# Altium PCB MotorController3.PcbDoc
Units mil, origin at the board's own origin, x right, y up, seen from the top; angles counter-clockwise.
Board outline 4000 x 3000 mil, 2 copper layers (Top Layer, Bottom Layer); 37 components, 31 nets, 115 pads, 10 vias.
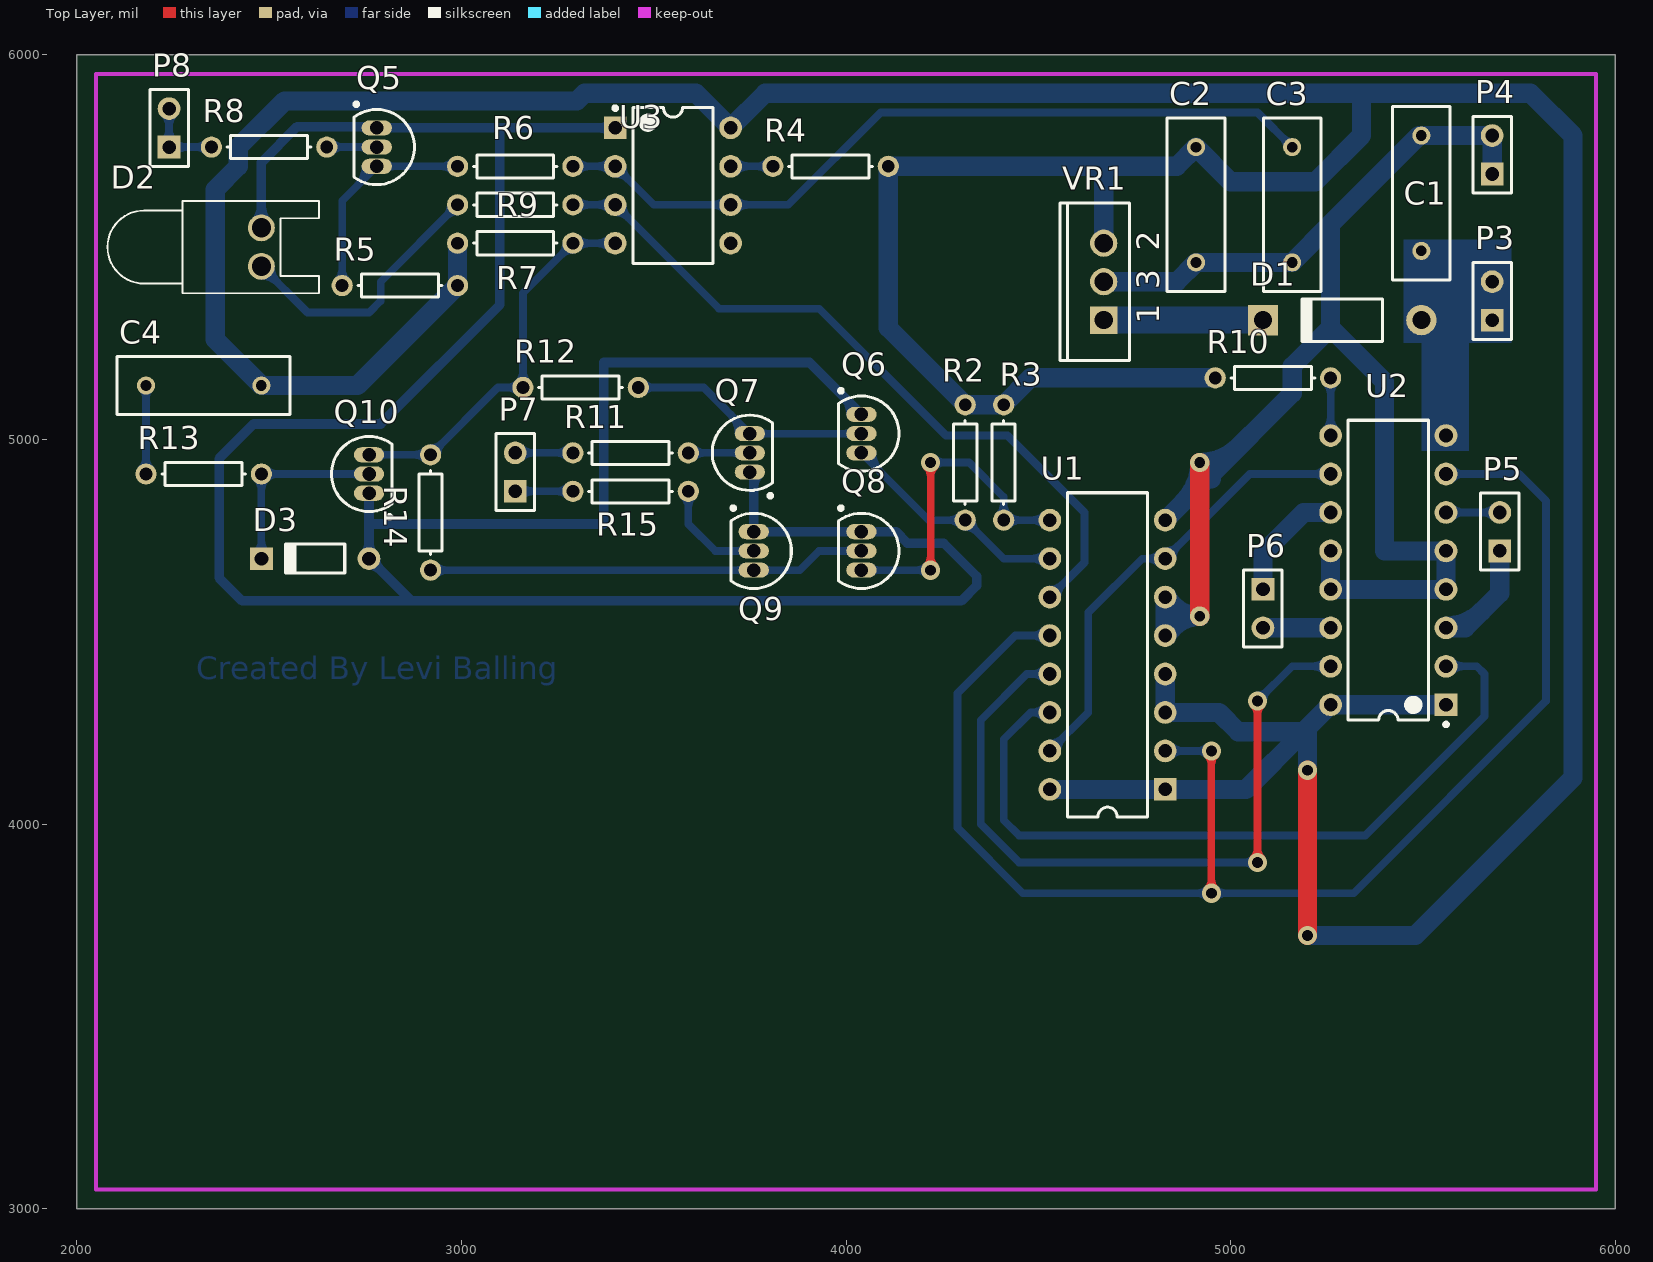
[diagram p0: Top Layer view]
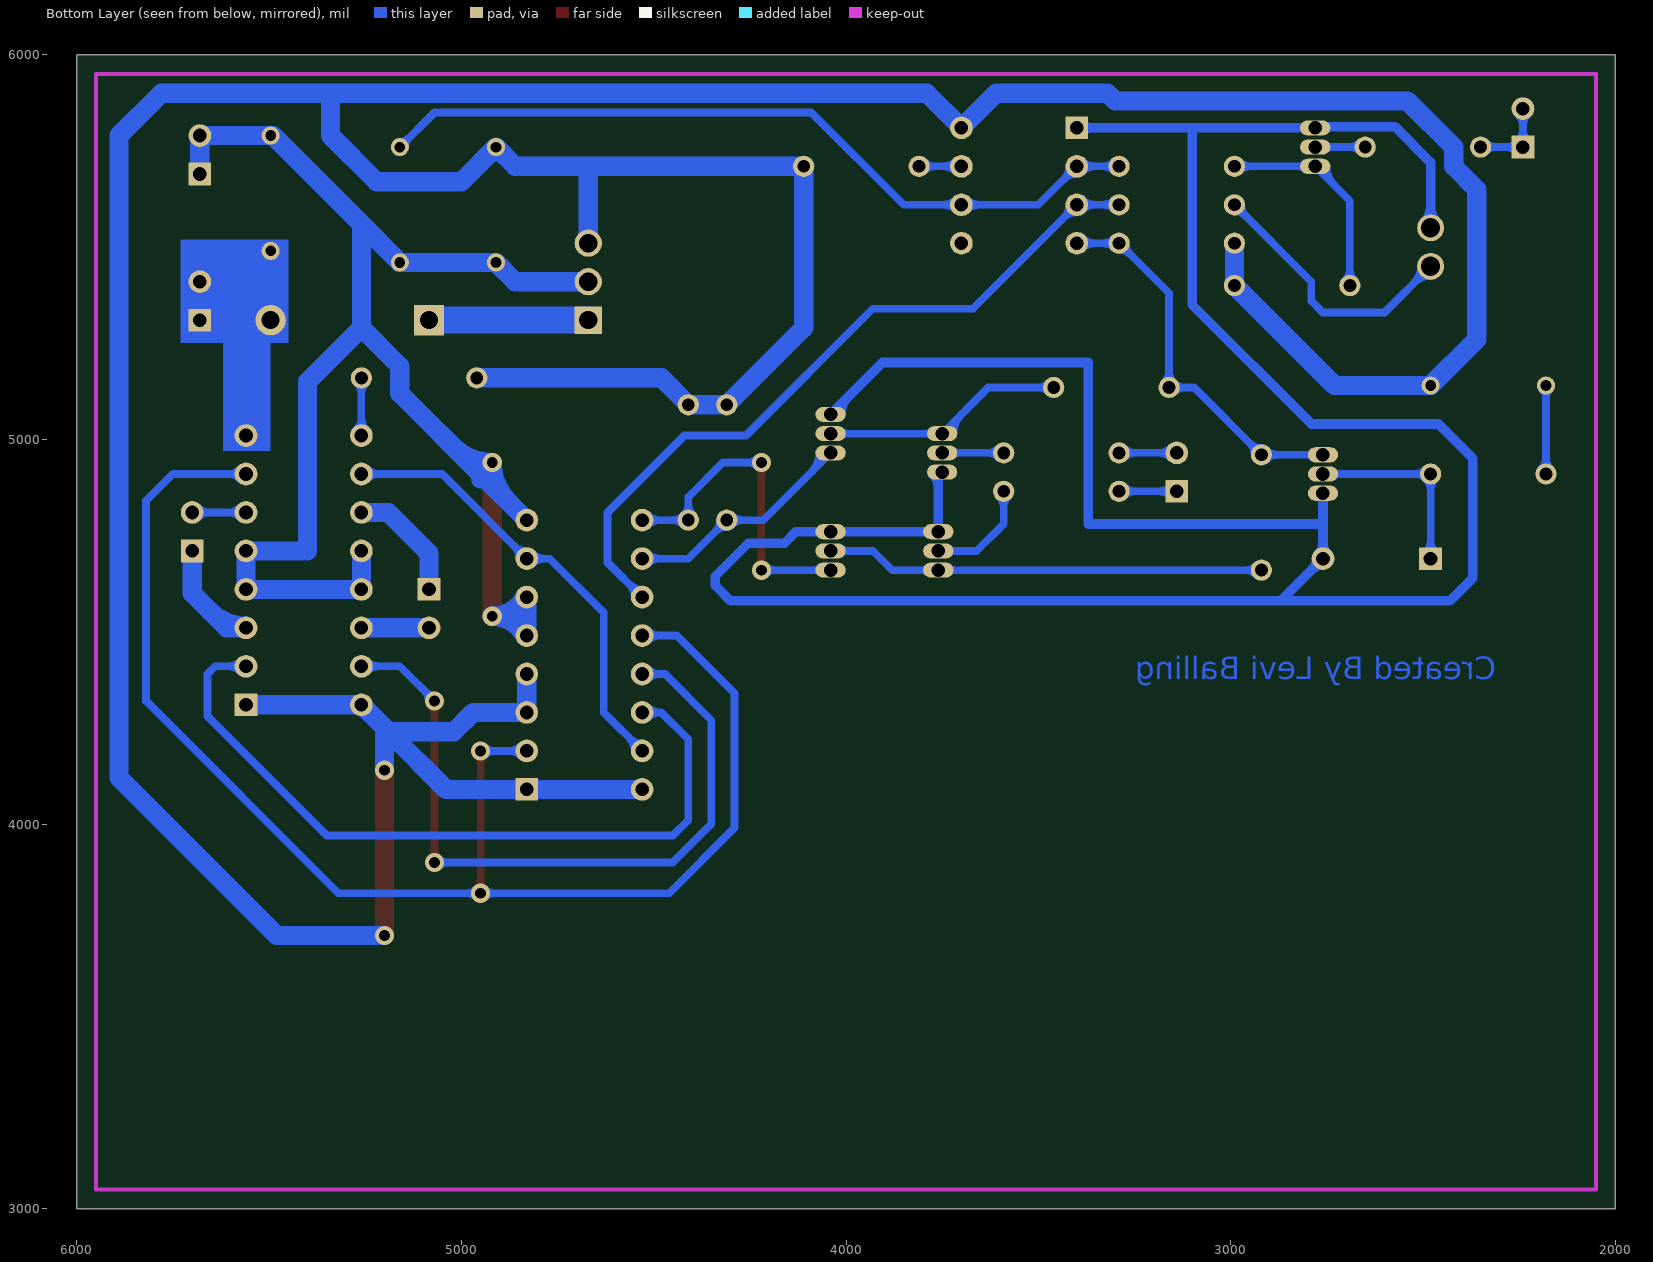
[diagram p1: Bottom Layer view, seen from below]

## Layer stack, top to bottom
Top Layer: signal copper 1.4
Dielectric: dielectric 12.6, FR-4, Dk 4.8
Bottom Layer: signal copper 1.4

## Board outline
2000,3000 6000,3000 6000,6000 2000,6000

## Design rules (kind name [scope] priority, off if disabled: settings)
Clearance [All] p1: gap=13
PolygonConnect [All] p1: connectstyle=Relief reliefconductorwidth=10 reliefentries=4 polygonreliefangle="90 Angle"
RoomDefinition MotorController [InComponentClass('MotorController')] p1: confinementstyle=ConfineIn formatcopy=TRUE lockcomponents=FALSE outline 6045,3055 14130,3055 14130,4025 6045,4025
RoutingVias [All] p1: holewidth=32 width=62 viastyle="Through Hole" minholewidth=28 minwidth=50 maxholewidth=28 maxwidth=50
SilkscreenOverComponentPads [All] p1: minsilkscreentomaskgap=10
SolderMaskExpansion [All] p1: expansion=4
Width GNDWidth [InNet('GND')] p1: maxlimit=100 minlimit=25 preferedwidth=50 minimp=50.000000 maximp=50.000000 favimp=50.000000
Width VCCWidth [InNet('VCC')] p2: maxlimit=100 minlimit=25 preferedwidth=50 minimp=50.000000 maximp=50.000000 favimp=50.000000
Width allWidths [All] p3: maxlimit=20 minlimit=20 preferedwidth=20 minimp=50.000000 maximp=50.000000 favimp=50.000000 checkconnectedcopper=TRUE
27 further rules are at their usual default settings.

## Components (designator, comment, footprint, x,y, rotation, side; value= is the part's Value field where it differs from the comment)
C1 "Cap" RAD-0.3 5495.91,5640 r90 top
C2 "Cap" RAD-0.3 4910,5610 r270 top
C3 "Cap" RAD-0.3 5160,5610 r270 top
C4 "Cap" RAD-0.3 2330,5140 r180 top
D1 "Diode 1N4001" DO-41 5290,5310 r180 top
D2 "LED0" LED-0 2480,5500 r270 top
D3 "Diode 1N4148" DO-35 2620,4690 r180 top
P3 "Header 2" HDR1X2 5680,5310 r90 top
P4 "Header 2" HDR1X2 5680,5690 r90 top
P5 "Header 2" HDR1X2 5700,4710 r90 top
P6 "Header 2" HDR1X2 5084.09,4610 r270 top
P7 "Header 2" HDR1X2 3140,4865 r90 top
P8 "Header 2" HDR1X2 2240,5760 r90 top
Q5 "2N3904" TO-92A 2780,5760 r180 top
Q6 "2N3904" TO-92A 4040,5015 r180 top
Q7 "2N3904" TO-92A 3750,4965 r0 top
Q8 "2N3904" TO-92A 4040,4710 r180 top
Q9 "2N3904" TO-92A 3760,4710 r180 top
Q10 "2N3904" TO-92A 2760,4910 r0 top
R2 "Res1" AXIAL-0.3 4310,4940 r270 top
R3 "Res1" AXIAL-0.3 4410,4940 r270 top
R4 "Res1" AXIAL-0.3 3960,5710 r0 top
R5 "Res1" AXIAL-0.3 2840,5400 r0 top
R6 "Res1" AXIAL-0.3 3140,5710 r180 top
R7 "Res1" AXIAL-0.3 3140,5510 r0 top
R8 "Res1" AXIAL-0.3 2500,5760 r180 top
R9 "Res1" AXIAL-0.3 3140,5610 r180 top
R10 "Res1" AXIAL-0.3 5110,5160 r0 top
R11 "Res1" AXIAL-0.3 3440,4965 r180 top
R12 "Res1" AXIAL-0.3 3310,5135 r0 top
R13 "Res1" AXIAL-0.3 2330,4910 r0 top
R14 "Res1" AXIAL-0.3 2920,4810 r270 top
R15 "Res1" AXIAL-0.3 3440,4865 r180 top
U1 "MC74HC194N" 648-06 4680,4440 r90 top
U2 "SN754410NE" NE016 5410,4660 r180 top
U3 "LM555CN" N08E 3550,5660 r0 top
VR1 "L7805CP" ISOWATT220AB 4670,5410 r90 top

## Footprints (in the part's own frame and the unit in brackets; to place one, negate y for a bottom-side part, rotate by r counter-clockwise, add the part's x,y. Pads: shape width x height; smd on the part's side, far side on the other; paste and mask are expansions set on the pad)
648-06 [mm] "DIP; 16 Leads; Row Spacing 7.62 mm; Pitch 2.54 mm"
  rect 1.5x1.5 hole 0.9: 1(-8.89,-3.81)
  round 1.5 hole 0.9: 2(-6.35,-3.81) 3(-3.81,-3.81) 4(-1.27,-3.81) 5(1.27,-3.81) 6(3.81,-3.81) 7(6.35,-3.81) 8(8.89,-3.81) 9(8.89,3.81) 10(6.35,3.81) 11(3.81,3.81) 12(1.27,3.81) 13(-1.27,3.81) 14(-3.81,3.81) 15(-6.35,3.81) 16(-8.89,3.81)
  silkscreen extent -10.7,-2.65 10.7,2.65
AXIAL-0.3 [mm] "Axial Device, Thru-Hole; 2 Leads; 0.3 in Pin Spacing"
  round 1.4 hole 0.85: 1(-3.81,0) 2(3.81,0)
  silkscreen extent -2.77,-0.76 2.77,0.76
DO-35 [mm] "Diode, Axial; Body 3.8 x 1.9 mm (LxDia. max), Lead Dia. 0.53 mm (max)"
  round 1.5 hole 0.9: 1(-3.55,0)
  rect 1.5x1.5 hole 0.9: 2(3.55,0)
  silkscreen extent -1.95,-0.95 2.05,0.95
DO-41 [mm] "Diode, Axial; Body 5.2 x 2.7 mm (LxDia. max), Lead Dia. 0.86 mm (max)"
  round 2 hole 1.2: 1(-5.23,0)
  rect 2x2 hole 1.2: 2(5.23,0)
  silkscreen extent -2.65,-1.4 2.75,1.4
HDR1X2 [mm] "Connector; Header; 2 Position"
  rect 1.5x1.5 hole 0.9: 1(0,0)
  round 1.5 hole 0.9: 2(2.54,0)
  silkscreen extent -1.27,-1.27 3.81,1.27
ISOWATT220AB [mm] "TO, Thru-Hole, Vertical, Heatsink Mounted; 3 In-Line Leads; Pitch 2.54 mm; Pin sequence 1, 3, 2"
  rect 1.8x1.8 hole 1.2: 1(-2.54,0)
  round 1.8 hole 1.2: 2(2.54,0) 3(0,0)
  silkscreen extent -5.2,-1.7 5.2,2.9
LED-0 [mil] "LED; 2 Leads"
  round 70 hole 50: 1(50,0) 2(-50,0)
  silkscreen extent -120,-400 120,150
N08E [mm] "DIP, 8-Leads, Row Spacing 7.62mm, Pitch 2.54mm, Body 9.91x6.35mm"
  rect 1.5x1.5 hole 0.9: 1(-3.81,3.81)
  round 1.5 hole 0.9: 2(-3.81,1.27) 3(-3.81,-1.27) 4(-3.81,-3.81) 5(3.81,-3.81) 6(3.81,-1.27) 7(3.81,1.27) 8(3.81,3.81)
  silkscreen extent -3.93,-5.15 2.65,5.23, body extent -3.6,-5.15 3.6,5.15, height 5.34
NE016 [mm] "DIP, 16-Leads, Row Spacing 7.62mm, Pitch 2.54mm, Body 19.4x6.35mm"
  rect 1.5x1.5 hole 0.9: 1(-3.81,8.89)
  round 1.5 hole 0.9: 2(-3.81,6.35) 3(-3.81,3.81) 4(-3.81,1.27) 5(-3.81,-1.27) 6(-3.81,-3.81) 7(-3.81,-6.35) 8(-3.81,-8.89) 9(3.81,-8.89) 10(3.81,-6.35) 11(3.81,-3.81) 12(3.81,-1.27) 13(3.81,1.27) 14(3.81,3.81) 15(3.81,6.35) 16(3.81,8.89)
  silkscreen extent -3.94,-9.9 2.65,10.31, body extent -3.3,-9.9 3.3,9.9, height 5.08
RAD-0.3 [mm] "Radial Cap, Thru-Hole; 2 Leads; 0.3 in Pin Spacing"
  round 1.2 hole 0.7: 1(-3.81,0) 2(3.81,0)
  silkscreen extent -5.71,-1.91 5.71,1.91
TO-92A [mm] "TO, Flat Index; 3 In-Line, Axial Leads; Body Dia. 4.5mm; Leads 0.51 x 0.48 mm (max)"
  oval 2x1 hole 0.9: 1(0,-1.27) 2(0,0) 3(0,1.27)
  silkscreen extent -2.48,-2.95 1.5,2.48, body extent -2.5,-2.5 1.5,2.5, height 6.86

## Part data
C1 C2 C3 C4: "Capacitor"
D1: "1 Amp General Purpose Rectifier"
D2: "Typical INFRARED GaAs LED"
D3: "High Conductance Fast Diode"
P3 P4 P5 P6 P7 P8: "Header, 2-Pin"
Q5 Q6 Q7 Q8 Q9 Q10: "NPN General Purpose Amplifier"
R2 R3 R4 R5 R6 R7 R8 R9 R10 R11 R12 R13 R14 R15: "Resistor"
U1: "4-Bit Bidirectional Universal Shift Register"
U2: "Quadruple Half-H Driver"
U3: "Timer"
VR1: "Positive Voltage Regulator"

## Via types
v1: diameter 50, hole 28, Top Layer to Bottom Layer, 10 vias

## Nets (pads, with @x,y where several pads share a name; then routed paths per layer and width w, separated by ;. In a path a pad name is that pad's centre, name@x,y a point inside that pad or via, vN(x,y) a via of type N, cw(c..) or ccw(c..) an arc to the next point about the centre after c; other vN are vias at no path point)
GND: C1.2 C2.2 C3.2 D2.2 D3.1 P4.1 P4.2 Q5.1 Q6.1 Q7.1 Q8.1 Q9.1 Q10.1 U1.5 U1.6 U1.8 U2.4 U2.5 U2.12 U2.13 U3.1 VR1.3 | length 12782.4
  Top Layer w50: v1(4920,4540) v1(4920,4940)
  Bottom Layer w25: D2.2@2464.09,5565.91 ccw(c2425.68,5604.32) 2480,5604.32 ccw(c2534.32,5604.32) D2.2@2495.91,5565.91 ; D2.2 2480,5720 2573.06,5813.06 Q5.1@2776.94,5813.06 ; 2735.58,5813.06 cw(c2735.58,5785.27) Q5.1@2755.23,5804.92 ; D3.1@2747.72,4702.04 ccw(c2718.66,4731.11) 2759.76,4731.11 ccw(c2800.87,4731.11) D3.1@2771.8,4702.04 ; D3.1@2759.76,4672.97 cw(c2759.76,4631.86) 2788.83,4660.93 cw(c2817.9,4690) D3.1@2776.79,4690 ; Q10.1@2759.76,4859.76 2759.76,4780 ; Q5.1 3100,5810 ; U3.1@3387.96,5797.96 ccw(c3358.89,5768.89) 3358.89,5810 ccw(c3358.89,5851.11) U3.1@3387.96,5822.04 ; U3.1 3100,5810 ; Q7.1 3760,4905 Q9.1 Q8.1 4130,4760 4160,4730 4254.09,4730 4340,4644.09 4340,4620 4300,4580 2869.76,4580 ; 3760,4874.27 cw(c3810.41,4874.27) Q7.1@3774.77,4909.92 ; 3994.13,5110.87 cw(c3948.26,5065) Q6.1@4013.13,5065 ; Q6.1 3905,5200 3370,5200 3370,4780 2759.76,4780 ; 2759.76,4780 D3.1 2869.76,4580 ; 2869.76,4580 2430,4580 2370,4640 2370,4950 2460,5040 2790,5040 3100,5350 3100,5810
  Bottom Layer w50: VR1.3 4860,5410 C2.2 C3.2 5260,5560 ; U1.5 4830,4540 ; U1.6 4830,4540 ; U1.8 4950,4910 ; U1.5@4834.01,4487.9 cw(c4920,4442.99) v1(4920,4540) ; U1.6@4834.01,4592.1 ccw(c4920,4637.01) v1(4920,4540) ; 4877.57,4837.57 ccw(c4775.15,4940) v1(4920,4940) ; 5022.43,4982.43 cw(c4920,5084.85) v1(4920,4940) ; U2.12 U2.13 U2.4 U2.5 5400,4710 5400,5150 5260,5290 ; P4.1 P4.2 C1.2 5490,5790 5260,5560 ; 4830,4540 v1(4920,4540) ; v1(4920,4940) cw(c4905,4897.58) 4950,4897.58 ccw(c4905,4897.58) v1(4920,4940) ; v1(4920,4940) 4950,4910 ; 4950,4910 5160,5120 5160,5190 5260,5290 ; 5260,5290 5260,5560
NetC1_1: C1.1 D1.1 P3.1 P3.2 U2.8 | length 960.7
  Bottom Layer w20: D1.1@5475.14,5330.77 ccw(c5425,5380.91) 5495.91,5380.91 ccw(c5566.81,5380.91) 5516.67,5330.77 ccw(c5566.81,5380.91) 5566.81,5310 ccw(c5566.81,5239.09) D1.1@5516.67,5289.23 ; C1.1@5486.27,5480.37 cw(c5463.02,5457.11) 5495.91,5457.11 cw(c5528.79,5457.11) C1.1@5505.54,5480.37 ; C1.1 D1.1 P3.1 P3.2 ; P3.1@5666.19,5296.19 ccw(c5632.86,5262.86) 5632.86,5310 ccw(c5632.86,5357.14) 5666.19,5323.81 ccw(c5632.86,5357.14) 5680,5357.14 ccw(c5727.14,5357.14) P3.1@5693.81,5323.81 ; P3.2@5666.19,5396.19 cw(c5632.86,5362.86) 5680,5362.86 cw(c5727.14,5362.86) P3.2@5693.81,5396.19
NetC3_1: C3.1 R6.1 U3.2 U3.6 | length 2462.6
  Bottom Layer w20: R6.1 U3.2 3500,5610 U3.6 3850,5610 4090,5850 5070,5850 C3.1 ; R6.1@3302.42,5697.58 cw(c3332.39,5667.61) 3332.39,5710 cw(c3332.39,5752.39) R6.1@3302.42,5722.42 ; U3.2@3386.19,5696.19 ccw(c3352.86,5662.86) 3352.86,5710 ccw(c3352.86,5757.14) U3.2@3386.19,5723.81 ; U3.2@3400,5690.47 cw(c3400,5643.33) 3433.34,5676.66 cw(c3466.67,5710) U3.2@3419.53,5710 ; U3.6@3686.19,5596.19 ccw(c3652.86,5562.86) 3652.86,5610 ccw(c3652.86,5657.14) U3.6@3686.19,5623.81 ; U3.6@3713.81,5596.19 cw(c3747.14,5562.86) 3747.14,5610 cw(c3747.14,5657.14) U3.6@3713.81,5623.81 ; C3.1@5146.38,5760 ccw(c5113.49,5760) 5136.75,5783.25 ccw(c5160,5806.51) C3.1@5160,5773.62
NetC4_2: C4.2 R13.1 | length 348.2
  Bottom Layer w20: R13.1@2167.58,4922.42 ccw(c2137.61,4952.39) 2180,4952.39 ccw(c2222.39,4952.39) R13.1@2192.42,4922.42 ; C4.2@2170.37,5130.37 cw(c2147.11,5107.11) 2180,5107.11 cw(c2212.89,5107.11) C4.2@2189.63,5130.37 ; R13.1 C4.2
NetD1_2: D1.2 VR1.1 | length 414.1
  Bottom Layer w70: VR1.1 D1.2
NetD2_1: D2.1 R9.2 | length 866.4
  Bottom Layer w20: D2.1@2480,5425 cw(c2480,5364.64) 2522.68,5407.32 cw(c2565.36,5450) D2.1@2505,5450 ; D2.1 2600,5330 2760,5330 2790,5360 2790,5410 R9.2 ; R9.2@2972.44,5610 cw(c2930.05,5610) 2960.02,5580.02 cw(c2990,5550.05) R9.2@2990,5592.44
NetD3_2: D3.2 Q10.2 R13.2 | length 743.7
  Bottom Layer w20: D3.2@2466.43,4703.81 ccw(c2433.66,4736.57) 2480,4736.57 ; R13.2@2467.58,4897.58 cw(c2437.61,4867.61) 2480,4867.61 cw(c2522.39,4867.61) 2492.42,4897.58 cw(c2522.39,4867.61) 2522.39,4910 cw(c2522.39,4952.39) R13.2@2492.42,4922.42 ; D3.2@2480,4690.24 R13.2 Q10.2 ; 2480,4737.71 ccw(c2527.95,4737.71) D3.2@2494.04,4703.81 ; Q10.2@2733.47,4903.15 ccw(c2716.93,4886.62) 2716.93,4910 ccw(c2716.93,4933.38) Q10.2@2733.47,4916.85
NetP5_1: P5.1 U2.3 | length 390.7
  Bottom Layer w50: U2.3 5610,4510 5700,4600 P5.1 ; U2.3@5560,4514.53 ccw(c5560,4646.17) 5653.08,4553.08
NetP5_2: P5.2 U2.6 | length 288.1
  Bottom Layer w20: U2.6 P5.2 ; U2.6@5573.81,4796.19 cw(c5607.14,4762.86) 5607.14,4810 cw(c5607.14,4857.14) U2.6@5573.81,4823.81 ; P5.2@5686.19,4796.19 ccw(c5652.86,4762.86) 5652.86,4810 ccw(c5652.86,4857.14) P5.2@5686.19,4823.81
NetP6_1: P6.1 U2.11 | length 313.9
  Bottom Layer w50: P6.1 5084.09,4704.09 5190,4810 U2.11
NetP6_2: P6.2 U2.14 | length 175.9
  Bottom Layer w50: P6.2 U2.14
NetP7_1: P7.1 R15.2 | length 290.6
  Bottom Layer w20: P7.1 R15.2 ; P7.1@3153.81,4851.19 cw(c3187.14,4817.86) 3187.14,4865 cw(c3187.14,4912.14) P7.1@3153.81,4878.81 ; R15.2@3277.58,4852.58 ccw(c3247.61,4822.61) 3247.61,4865 ccw(c3247.61,4907.39) R15.2@3277.58,4877.42
NetP7_2: P7.2 R11.2 | length 290.6
  Bottom Layer w20: P7.2 R11.2 ; P7.2@3153.81,4951.19 cw(c3187.14,4917.86) 3187.14,4965 cw(c3187.14,5012.14) P7.2@3153.81,4978.81 ; R11.2@3277.58,4952.58 ccw(c3247.61,4922.61) 3247.61,4965 ccw(c3247.61,5007.39) R11.2@3277.58,4977.42
NetP8_1: P8.1 P8.2 R8.2 | length 498.7
  Bottom Layer w20: P8.1@2226.19,5773.81 ccw(c2192.86,5807.14) 2240,5807.14 ccw(c2287.14,5807.14) 2253.81,5773.81 ccw(c2287.14,5807.14) 2287.14,5760 ccw(c2287.14,5712.86) P8.1@2253.81,5746.19 ; P8.2@2226.19,5846.19 cw(c2192.86,5812.86) 2240,5812.86 cw(c2287.14,5812.86) P8.2@2253.81,5846.19 ; P8.2 P8.1 R8.2 ; R8.2@2337.58,5747.58 ccw(c2307.61,5717.61) 2307.61,5760 ccw(c2307.61,5802.39) R8.2@2337.58,5772.42
NetQ5_2: Q5.2 R8.1 | length 233.3
  Bottom Layer w20: R8.1 Q5.2 ; R8.1@2662.42,5747.58 cw(c2692.39,5717.61) 2692.39,5760 cw(c2692.39,5802.39) R8.1@2662.42,5772.42 ; Q5.2@2753.47,5753.15 ccw(c2736.93,5736.62) 2736.93,5760 ccw(c2736.93,5783.38) Q5.2@2753.47,5766.85
NetQ5_3: Q5.3 R5.1 R6.2 | length 782.9
  Bottom Layer w20: R5.1@2677.58,5412.42 ccw(c2647.61,5442.39) 2690,5442.39 ccw(c2732.39,5442.39) R5.1@2702.42,5412.42 ; R5.1 2690,5620 Q5.3 R6.2 ; 2729.86,5659.86 ccw(c2679.72,5710) Q5.3@2750.63,5710 ; Q5.3@2806.53,5703.15 cw(c2823.07,5686.62) 2823.07,5710 cw(c2823.07,5733.38) Q5.3@2806.53,5716.85 ; R6.2@2977.58,5697.58 ccw(c2947.61,5667.61) 2947.61,5710 ccw(c2947.61,5752.39) R6.2@2977.58,5722.42
NetQ6_2: Q6.2 Q7.3 R12.2 | length 825.4
  Bottom Layer w20: R12.2 3630,5135 Q7.3 Q6.2 ; R12.2@3472.42,5122.58 cw(c3502.39,5092.61) 3502.39,5135 cw(c3502.39,5177.39) R12.2@3472.42,5147.42 ; 3699.86,5065.14 cw(c3649.72,5015) Q7.3@3720.63,5015 ; Q7.3@3776.53,5008.15 cw(c3793.07,4991.62) 3793.07,5015 cw(c3793.07,5038.38) Q7.3@3776.53,5021.85 ; Q6.2@4013.47,5008.15 ccw(c3996.93,4991.62) 3996.93,5015 ccw(c3996.93,5038.38) Q6.2@4013.47,5021.85
NetQ6_3: Q6.3 R2.2 U1.10 | length 866.8
  Bottom Layer w20: Q6.3 4215,4790 R2.2 4410,4690 U1.10 ; Q6.3@4069.37,4965 ccw(c4140.28,4965) 4090.14,4914.86 ; R2.2@4297.58,4777.58 ccw(c4267.61,4747.61) 4267.61,4790 ccw(c4267.61,4832.39) R2.2@4297.58,4802.42 ; R2.2@4310,4772.44 cw(c4310,4730.05) 4339.98,4760.02 cw(c4369.95,4790) R2.2@4327.56,4790 ; U1.10@4516.19,4676.19 ccw(c4482.86,4642.86) 4482.86,4690 ccw(c4482.86,4737.14) U1.10@4516.19,4703.81
NetQ7_2: Q7.2 R11.1 | length 263.3
  Bottom Layer w20: R11.1 Q7.2 ; R11.1@3602.42,4952.58 cw(c3632.39,4922.61) 3632.39,4965 cw(c3632.39,5007.39) R11.1@3602.42,4977.42 ; Q7.2@3723.47,4958.15 ccw(c3706.93,4941.62) 3706.93,4965 ccw(c3706.93,4988.38) Q7.2@3723.47,4971.85
NetQ8_2: Q8.2 Q9.3 R14.2 | length 1317.5
  Bottom Layer w20: R14.2 Q9.3 3880,4660 3930,4710 Q8.2 ; R14.2@2932.42,4647.58 cw(c2962.39,4617.61) 2962.39,4660 cw(c2962.39,4702.39) R14.2@2932.42,4672.42 ; Q9.3@3733.47,4653.15 ccw(c3716.93,4636.62) 3716.93,4660 ccw(c3716.93,4683.38) Q9.3@3733.47,4666.85 ; Q9.3@3786.53,4653.15 cw(c3803.07,4636.62) 3803.07,4660 cw(c3803.07,4683.38) Q9.3@3786.53,4666.85 ; Q8.2@4013.47,4703.15 ccw(c3996.93,4686.62) 3996.93,4710 ccw(c3996.93,4733.38) Q8.2@4013.47,4716.85
NetQ8_3: Q8.3 R3.2 U1.9 | length 1338.8
  Top Layer w20: v1@4209.39,4670.61 ccw(c4183.79,4696.21) 4220,4696.21 ccw(c4256.21,4696.21) v1@4230.61,4670.61 ; v1@4209.39,4929.39 cw(c4183.79,4903.79) 4220,4903.79 cw(c4256.21,4903.79) v1@4230.61,4929.39 ; v1(4220,4660) v1(4220,4940)
  Bottom Layer w20: Q8.3 v1(4220,4660) ; Q8.3@4066.53,4653.15 cw(c4083.07,4636.62) 4083.07,4660 cw(c4083.07,4683.38) Q8.3@4066.53,4666.85 ; v1@4209.39,4649.39 ccw(c4183.79,4623.79) 4183.79,4660 ccw(c4183.79,4696.21) v1@4209.39,4670.61 ; v1(4220,4940) 4320,4940 4410,4850 R3.2 U1.9 ; v1@4230.61,4929.39 cw(c4256.21,4903.79) 4256.21,4940 cw(c4256.21,4976.21) v1@4230.61,4950.61 ; R3.2@4397.58,4802.42 ccw(c4367.61,4832.39) 4410,4832.39 ccw(c4452.39,4832.39) 4422.42,4802.42 ccw(c4452.39,4832.39) 4452.39,4790 ccw(c4452.39,4747.61) R3.2@4422.42,4777.58 ; U1.9@4516.19,4776.19 ccw(c4482.86,4742.86) 4482.86,4790 ccw(c4482.86,4837.14) U1.9@4516.19,4803.81
NetQ9_2: Q9.2 R15.1 | length 387.3
  Bottom Layer w20: R15.1@3577.58,4852.58 cw(c3547.61,4822.61) 3590,4822.61 cw(c3632.39,4822.61) R15.1@3602.42,4852.58 ; R15.1 3590,4780 3660,4710 Q9.2 ; Q9.2@3733.47,4703.15 ccw(c3716.93,4686.62) 3716.93,4710 ccw(c3716.93,4733.38) Q9.2@3733.47,4716.85
NetQ10_3: Q10.3 R7.2 R12.1 R14.1 U3.4 | length 1521.6
  Bottom Layer w20: Q10.3 R14.1 3095,5135 R12.1 3160,5380 R7.2 U3.4 ; Q10.3@2786.53,4953.15 cw(c2803.07,4936.62) 2803.07,4960 cw(c2803.07,4983.38) Q10.3@2786.53,4966.85 ; R14.1@2907.58,4947.58 ccw(c2877.61,4917.61) 2877.61,4960 ccw(c2877.61,5002.39) R14.1@2907.58,4972.42 ; R14.1@2920,4977.56 ccw(c2920,5019.95) 2949.98,4989.98 ccw(c2979.95,4960) R14.1@2937.56,4960 ; R12.1@3147.58,5122.58 ccw(c3117.61,5092.61) 3117.61,5135 ccw(c3117.61,5177.39) 3147.58,5147.42 ccw(c3117.61,5177.39) 3160,5177.39 ccw(c3202.39,5177.39) R12.1@3172.42,5147.42 ; R7.2@3272.44,5510 cw(c3230.05,5510) 3260.02,5480.02 cw(c3290,5450.05) R7.2@3290,5492.44 ; R7.2@3302.42,5497.58 cw(c3332.39,5467.61) 3332.39,5510 cw(c3332.39,5552.39) R7.2@3302.42,5522.42 ; U3.4@3386.19,5496.19 ccw(c3352.86,5462.86) 3352.86,5510 ccw(c3352.86,5557.14) U3.4@3386.19,5523.81
NetR4_1: R4.1 U3.7 | length 250.6
  Bottom Layer w20: U3.7 R4.1 ; U3.7@3713.81,5696.19 cw(c3747.14,5662.86) 3747.14,5710 cw(c3747.14,5757.14) U3.7@3713.81,5723.81 ; R4.1@3797.58,5697.58 ccw(c3767.61,5667.61) 3767.61,5710 ccw(c3767.61,5752.39) R4.1@3797.58,5722.42
NetR9_1: R9.1 U1.11 U3.3 | length 2207.4
  Bottom Layer w20: R9.1 U3.3 3670,5340 3930,5340 4260,5010 4420,5010 4620,4810 4620,4680 U1.11 ; R9.1@3302.42,5597.58 cw(c3332.39,5567.61) 3332.39,5610 cw(c3332.39,5652.39) R9.1@3302.42,5622.42 ; U3.3@3386.19,5596.19 ccw(c3352.86,5562.86) 3352.86,5610 ccw(c3352.86,5657.14) U3.3@3386.19,5623.81 ; U3.3@3400,5590.47 cw(c3400,5543.33) 3433.34,5576.66 cw(c3466.67,5610) U3.3@3419.53,5610 ; U1.11@4530,4609.53 ccw(c4530,4656.67) 4563.34,4623.34 ccw(c4596.67,4590) U1.11@4549.53,4590
NetR10_2: R10.2 U2.9 | length 290.6
  Bottom Layer w20: U2.9@5246.19,5023.81 ccw(c5212.86,5057.14) 5260,5057.14 ccw(c5307.14,5057.14) U2.9@5273.81,5023.81 ; R10.2@5247.58,5147.58 cw(c5217.61,5117.61) 5260,5117.61 cw(c5302.39,5117.61) R10.2@5272.42,5147.58 ; U2.9 R10.2
NetU1_2: U1.2 U1.12 U2.7 | length 4265.2
  Top Layer w20: v1@4939.39,3830.61 ccw(c4913.79,3856.21) 4950,3856.21 ccw(c4986.21,3856.21) v1@4960.61,3830.61 ; v1@4939.39,4179.39 cw(c4913.79,4153.79) 4950,4153.79 cw(c4986.21,4153.79) v1@4960.61,4179.39 ; v1(4950,3820) v1(4950,4190)
  Bottom Layer w20: U1.12@4516.19,4476.19 ccw(c4482.86,4442.86) 4482.86,4490 ccw(c4482.86,4537.14) U1.12@4516.19,4503.81 ; U1.12 4440,4490 4290,4340 4290,3990 4460,3820 v1(4950,3820) 5320,3820 5820,4320 5820,4840 5750,4910 U2.7 ; U1.2 v1(4950,4190) ; U1.2@4843.81,4176.19 cw(c4877.14,4142.86) 4877.14,4190 cw(c4877.14,4237.14) U1.2@4843.81,4203.81 ; v1@4939.39,3809.39 ccw(c4913.79,3783.79) 4913.79,3820 ccw(c4913.79,3856.21) v1@4939.39,3830.61 ; v1@4939.39,4179.39 ccw(c4913.79,4153.79) 4913.79,4190 ccw(c4913.79,4226.21) v1@4939.39,4200.61 ; v1@4960.61,3809.39 cw(c4986.21,3783.79) 4986.21,3820 cw(c4986.21,3856.21) v1@4960.61,3830.61 ; U2.7@5573.81,4896.19 cw(c5607.14,4862.86) 5607.14,4910 cw(c5607.14,4957.14) U2.7@5573.81,4923.81
NetU1_7: U1.7 U1.15 U2.10 | length 1476.8
  Bottom Layer w20: U1.15 4630,4290 4630,4550 4770,4690 U1.7 5050,4910 U2.10 ; U1.15@4530,4209.53 ccw(c4530,4256.67) 4563.34,4223.34 ccw(c4596.67,4190) U1.15@4549.53,4190 ; U1.7@4816.19,4676.19 ccw(c4782.86,4642.86) 4782.86,4690 ccw(c4782.86,4737.14) U1.7@4816.19,4703.81 ; U1.7@4830,4709.53 ccw(c4830,4756.67) 4863.34,4723.34 ccw(c4896.67,4690) U1.7@4849.53,4690 ; U2.10@5246.19,4896.19 ccw(c5212.86,4862.86) 5212.86,4910 ccw(c5212.86,4957.14) U2.10@5246.19,4923.81
NetU1_13: U1.13 U2.15 | length 2284
  Top Layer w20: v1@5059.39,3910.61 ccw(c5033.79,3936.21) 5070,3936.21 ccw(c5106.21,3936.21) v1@5080.61,3910.61 ; v1@5059.39,4309.39 cw(c5033.79,4283.79) 5070,4283.79 cw(c5106.21,4283.79) v1@5080.61,4309.39 ; v1(5070,3900) v1(5070,4320)
  Bottom Layer w20: U1.13@4516.19,4376.19 ccw(c4482.86,4342.86) 4482.86,4390 ccw(c4482.86,4437.14) U1.13@4516.19,4403.81 ; U1.13 4470,4390 4350,4270 4350,4000 4450,3900 v1(5070,3900) ; v1@5059.39,3889.39 ccw(c5033.79,3863.79) 5033.79,3900 ccw(c5033.79,3936.21) v1@5059.39,3910.61 ; v1(5070,4320) 5160,4410 U2.15 ; v1@5070,4335 ccw(c5070,4371.21) 5095.61,4345.61 ccw(c5121.21,4320) v1@5085,4320 ; U2.15@5246.19,4396.19 ccw(c5212.86,4362.86) 5212.86,4410 ccw(c5212.86,4457.14) U2.15@5246.19,4423.81
NetU1_14: U1.14 U2.2 | length 2120.4
  Bottom Layer w20: U1.14@4516.19,4276.19 ccw(c4482.86,4242.86) 4482.86,4290 ccw(c4482.86,4337.14) U1.14@4516.19,4303.81 ; U1.14 4480,4290 4410,4220 4410,4010 4450,3970 5350,3970 5660,4280 5660,4390 5640,4410 U2.2 ; U2.2@5573.81,4396.19 cw(c5607.14,4362.86) 5607.14,4410 cw(c5607.14,4457.14) U2.2@5573.81,4423.81
VCC: C2.1 C4.1 R2.1 R3.1 R4.2 R5.2 R7.1 R10.1 U1.1 U1.3 U1.4 U1.16 U2.1 U2.16 U3.8 VR1.2 | length 12771.6
  Top Layer w50: v1(5200,3710) v1(5200,4140)
  Bottom Layer w50: R7.1 R5.2 2730,5140 C4.1 2360,5260 2360,5650 2420,5710 2420,5760 2540,5880 3300,5880 3320,5900 3610,5900 U3.8 3790,5900 5340,5900 ; U1.16 U1.1 5040,4090 5190,4240 ; VR1.2 4670,5710 ; U1.4 U1.3 4970,4290 5020,4240 5190,4240 ; R10.1 4480,5160 R3.1 R2.1 4110,5290 R4.2 4670,5710 ; v1(5200,3710) 5480,3710 5890,4120 5890,5790 5780,5900 5340,5900 ; v1(5200,4140) 5200,4250 ; U2.1 U2.16 5200,4250 ; 4670,5710 4860,5710 C2.1 5000,5670 5220,5670 5340,5790 5340,5900 ; 5190,4240 5200,4250
pads on no net: U3.5

## Keep-outs
Keep-Out Layer:
  lines w10: 2050,3050 5950,3050 5950,5950 2050,5950 2050,3050

## Other copper
Bottom Layer:
  rectangle net NetC1_1: 5495.91,4970 5620,5250
  rectangle net NetC1_1: 5450,5250 5730,5520
  text "Created By Levi Balling" at 2310,4356.58 h100

## Silkscreen, mask and mechanical layers (free items; w line width, h text height)
Drill Drawing:
  text ".LEGEND" at 6200,3200 h60
  text "Drill Drawing." at 6200,3100 h60

## Dimensions
2050,3050 to 5950,3050 on Mechanical 1
2050,3050 to 2050,5950 on Mechanical 1

## Text inside footprints (layer, text, board x,y; h text height)
VR1: Top Overlay "3" at 4814.69,5390.31 h59.06 r90; Top Overlay "2" at 4814.68,5490.32 h59.06 r90; Top Overlay "1" at 4814.68,5300.16 h59.06 r90